# Altium PCB PCB1.PcbDoc
Units mm, origin at the board's own origin, x right, y up, seen from the top; angles counter-clockwise.
Board outline 109.07 x 200 mm, 2 copper layers (Top Layer, Bottom Layer); 62 components, 106 nets, 397 pads, 1 vias.
Unrouted connection lines stored in the file: 204.
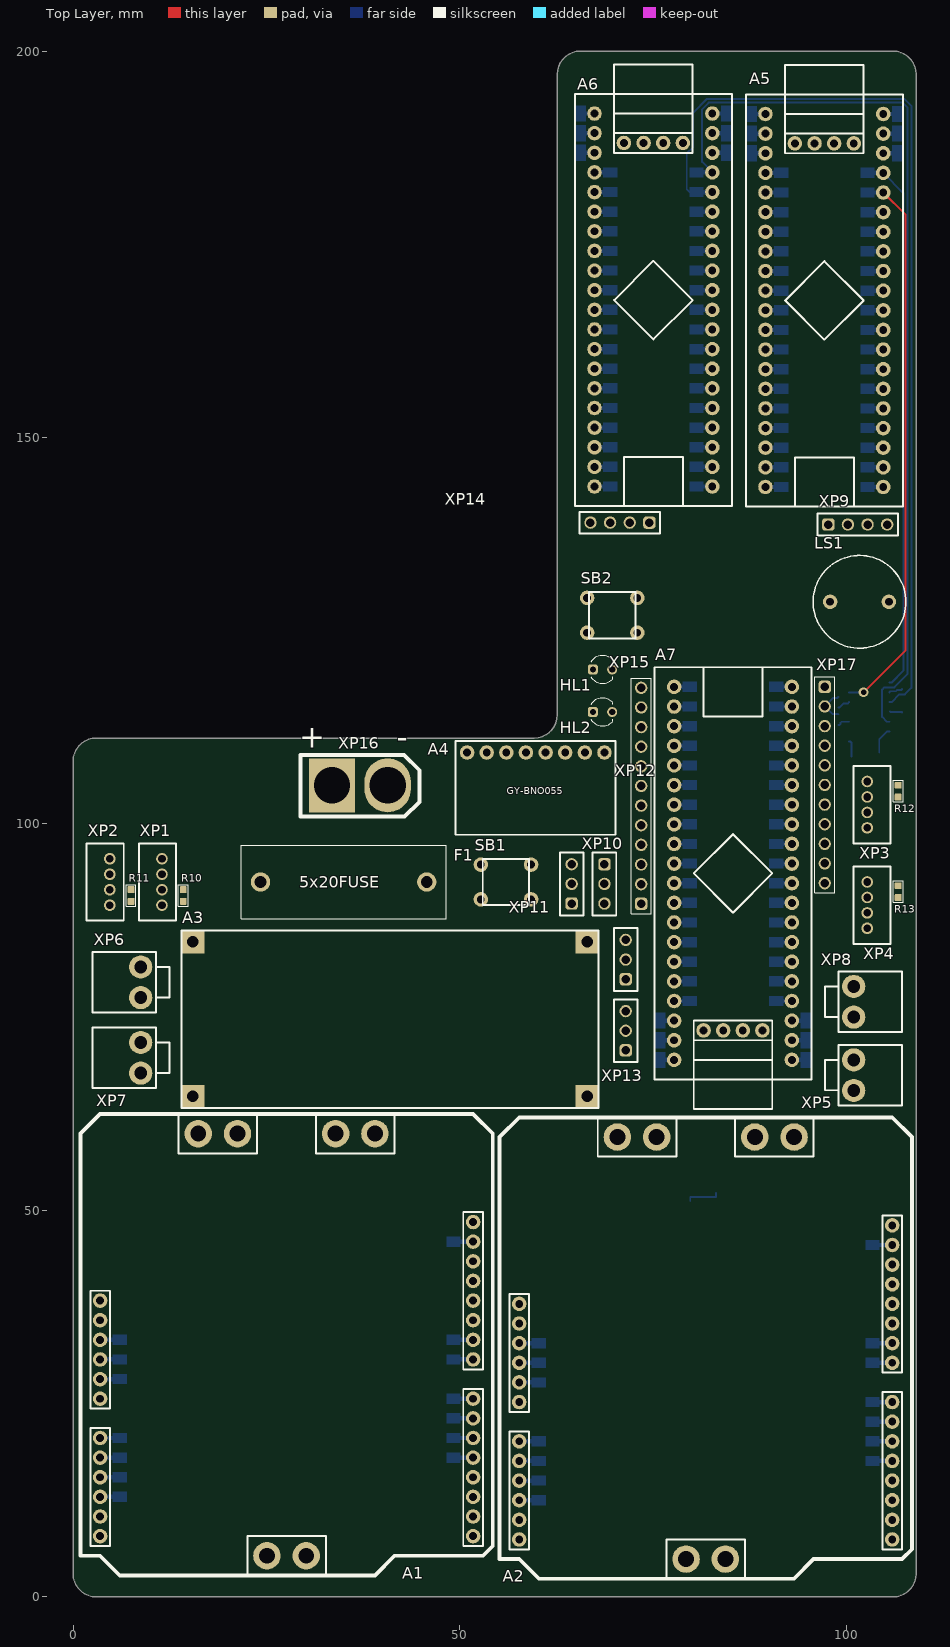
[diagram p0: Top Layer view]
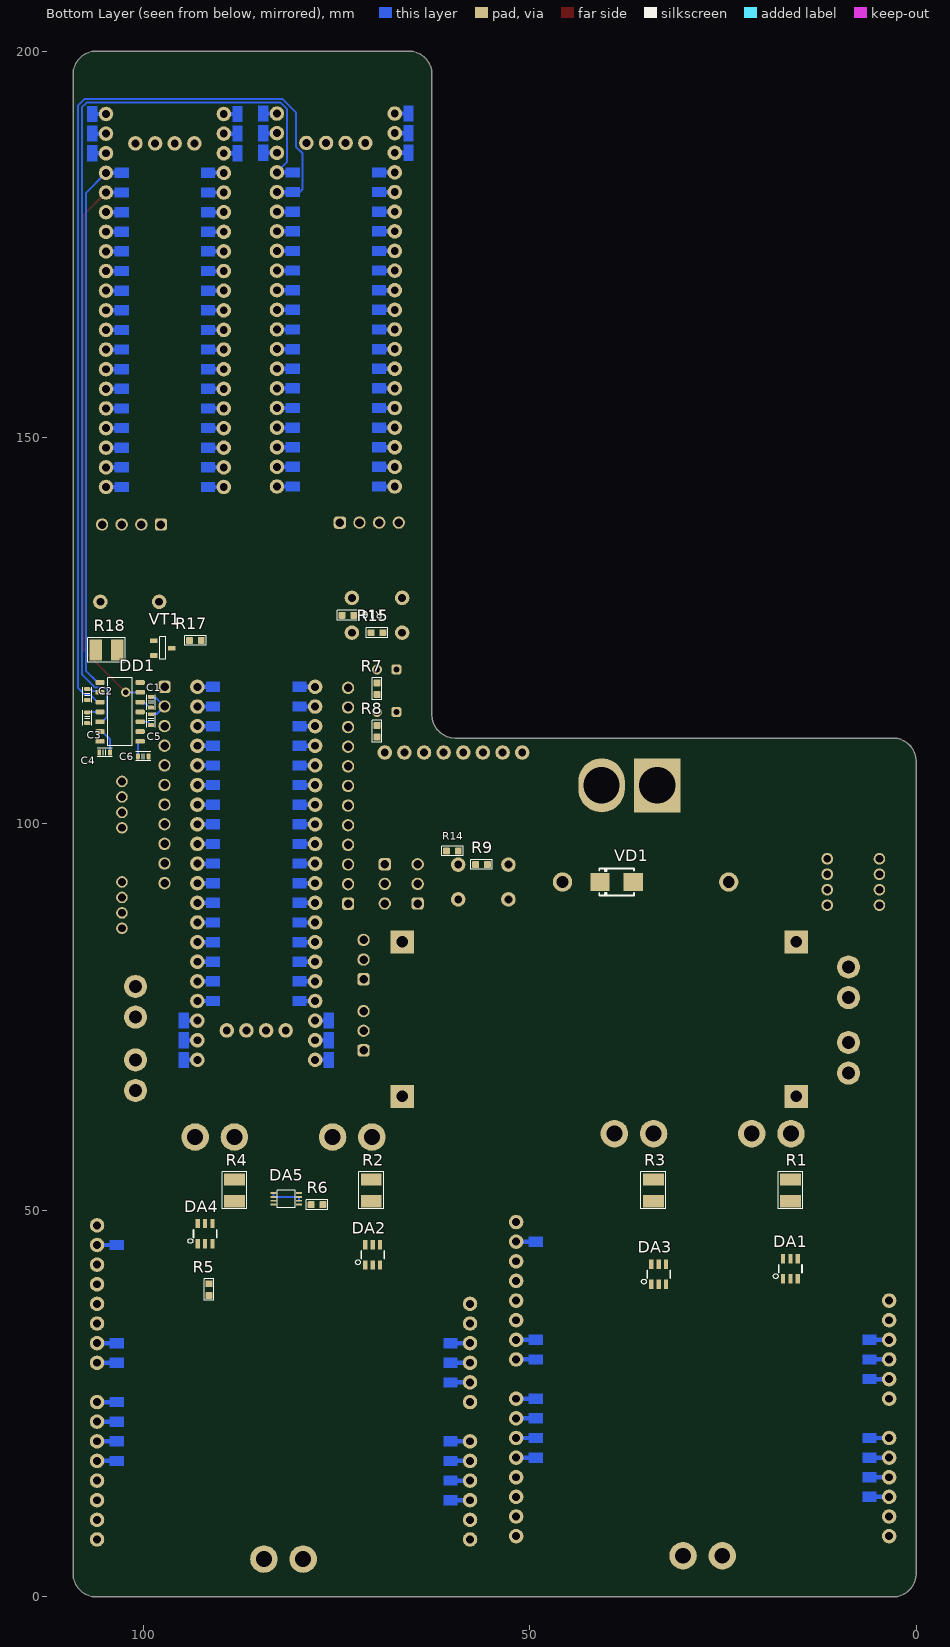
[diagram p1: Bottom Layer view, seen from below]

## Layer stack, top to bottom
Top Solder: solder mask 0.0102, Solder Resist, Dk 3.5
Top Layer: signal copper 0.0356
Dielectric 1: dielectric 0.32, FR-4, Dk 4.8
Bottom Layer: signal copper 0.0356
Bottom Solder: solder mask 0.0102, Solder Resist, Dk 3.5

## Board outline
0,3 0.046,2.479 0.181,1.974 0.402,1.5 0.702,1.072 1.072,0.702 1.5,0.402 1.974,0.181 2.479,0.046 3,0 106.074,0 106.595,0.046 107.1,0.181 107.574,0.402 108.003,0.702 108.372,1.072 108.672,1.5 108.893,1.974 109.029,2.479 109.074,3 109.074,197 109.029,197.521 108.893,198.026 108.672,198.5 108.372,198.928 108.003,199.298 107.574,199.598 107.1,199.819 106.595,199.954 106.074,200 65.648,200 65.127,199.954 64.622,199.819 64.148,199.598 63.72,199.298 63.35,198.928 63.05,198.5 62.829,198.026 62.694,197.521 62.648,197 62.648,114.12 62.603,113.599 62.467,113.094 62.246,112.62 61.946,112.192 61.576,111.822 61.148,111.522 60.674,111.301 60.169,111.166 59.648,111.12 3,111.12 2.479,111.074 1.974,110.939 1.5,110.718 1.072,110.418 0.702,110.048 0.402,109.62 0.181,109.146 0.046,108.641 0,108.12

## Design rules (kind name [scope] priority, off if disabled: settings)
BoardOutlineClearance [All] p1: gap=0.5 ignorepadtopadclearanceinfootprint=FALSE
Clearance Clearance_1 [All] p1: gap=0.254 ignorepadtopadclearanceinfootprint=FALSE except(0: Arc-Hole Track-Hole SMDPad-Hole THPad-Hole Via-Hole Fill-Hole Poly-Hole Region-Hole Text-Hole; 0.2: Arc-SMDPad Track-SMDPad SMDPad-SMDPad)
Clearance [All] p2: gap=0.3 ignorepadtopadclearanceinfootprint=FALSE
HoleSize [All] p1: absolutevalues=TRUE maxlimit=4.7 minlimit=0.025 maxpercent=80.000 minpercent=20.000
PolygonConnect [All] p1: connectstyle=Relief reliefconductorwidth=0.254 reliefentries=4 polygonreliefangle="90 Angle" airgapwidth=0.254
RoutingVias [All] p1: holewidth=0.711 width=1.27 viastyle="Through Hole" minholewidth=0.3 minwidth=0.5 maxholewidth=0.711 maxwidth=1.27
RoutingVias RoutingVias_1 [All] p2: holewidth=0.711 width=1.27 viastyle="Through Hole" minholewidth=0.711 minwidth=1.27 maxholewidth=0.711 maxwidth=1.27
SilkToSilkClearance [All] p1: silktosilkclearance=0.1
SilkToSolderMaskClearance [IsPad] p1: minsilkscreentomaskgap=0.1 clearancetoexposedcopper=TRUE
SolderMaskExpansion [All] p1: expansion=0.102 istentingtop=FALSE
Width [All] p1: maxlimit=3 minlimit=0.254 preferedwidth=0.254
27 further rules are at their usual default settings.

## Classes and differential pairs
component class Sheet2: A4 A7 C1 C2 C3 C4 C5 F1 HL1 HL2 LS1 R7 R8 R9 R10 R11 R12 R13 R14 R15 R16 R17 R18 SB1 SB2 VD1 VT1 XP15 XP16 XP17
component class Sheet1: A1 A2 A3 A5 A6 DA1 DA2 DA3 DA4 DA5 R1 R2 R3 R4 R5 R6 XP1 XP2 XP3 XP4 XP5 XP6 XP7 XP8 XP9 XP10 XP11 XP12 XP13 XP14

## Components (designator, comment, footprint, x,y, rotation, side; value= is the part's Value field where it differs from the comment)
A1 "Monster Moto Shield" "Monster Moto Shield" 27.62,32.625 r0 top
A2 "Monster Moto Shield" "Monster Moto Shield" 81.85,32.195 r0 top
A3 "DC-DC Board" "DC-DC Board" 14,63.25 r0 top
A4 "GY-BNO055" "GY-BNO055 board" 50.97,109.25 r270 top
A5 "Bluepill-stm32f103c8t6" BluePill 97.199,167.735 r180 top
A6 "Bluepill-stm32f103c8t6" BluePill 75.079,167.795 r180 top
A7 "Blackpill-stm32f401ccu6" BluePill 85.38,93.61 r0 top
C1 "10пФ" C0603C 99,115.75 r90 bottom value=10
C2 "10пФ" C0603C 107.25,116.75 r270 bottom value=10
C3 "10пФ" C0603C 107.25,113.75 r270 bottom value=10
C4 "10пФ" C0603C 105,109.25 r0 bottom value=10
C5 "=Value" C0603C 99,113.5 r90 bottom
C6 "=Value" C0603C 100,108.75 r180 bottom
DA1 "INA181A1IDBVR" SOT236 16.266,42.45 r180 bottom
DA2 "INA181A1IDBVR" SOT236 70.316,44.25 r180 bottom
DA3 "INA181A1IDBVR" SOT236 33.316,41.75 r180 bottom
DA4 "INA181A1IDBVR" SOT236 92,47 r180 bottom
DA5 "LM358DGKR" VSSOP-8 81.5,51.5 r180 bottom
DD1 "74HC14" SO-14 103,114.5 r0 bottom
F1 "ва" BLX-A 35,92.5 r180 top
HL1 "Обозначение при заказе" ledrad3mm 68.5,120 r0 top
HL2 "Обозначение при заказе" ledrad3mm 68.5,114.5 r0 top
LS1 "Обозначение при заказе" "Buzzer 12mm" 101.75,128.75 r0 top
R1 "ва" R1210 16.25,52.6 r90 bottom
R2 "ва" R1210 70.5,52.6 r90 bottom
R3 "ва" R1210 34,52.6 r90 bottom
R4 "ва" R1210 88.2,52.6 r270 bottom
R5 "ва" R0603 91.5,39.75 r180 bottom
R6 "ва" R0603 77.512,50.75 r270 bottom
R7 "ва" R0603 69.75,117.5 r180 bottom
R8 "ва" R0603 69.75,112 r180 bottom
R9 "ва" R0603 56.238,94.75 r270 bottom
R10 "ва" R0603 14.25,90.75 r0 top
R11 "ва" R0603 7.5,90.75 r0 top
R12 "ва" R0603 106.75,104.25 r180 top
R13 "ва" R0603 106.75,91.25 r180 top
R14 "ва" R0603 60,96.5 r270 bottom
R15 "ва" R0603 69.75,124.75 r270 bottom
R16 "ва" R0603 73.512,127 r270 bottom
R17 "ва" R0603 93.25,123.75 r90 bottom
R18 "ва" R1210 104.75,122.5 r180 bottom
SB1 "KLS7-TS6601-13.0-180" Button 56,92.5 r0 top
SB2 "KLS7-TS6601-13.0-180" Button 69.75,127 r0 top
VD1 "Диод защитный" SMB 38.75,92.5 r0 bottom
VT1 "" SOT23-3-BEC 97.475,122.75 r180 bottom
XP1 "JST4" "JST 4pin" 11.5,89.5 r90 top
XP2 "JST4" "JST 4pin" 4.75,89.5 r90 top
XP3 "JST4" "JST 4pin" 102.75,105.5 r270 top
XP4 "JST4" "JST 4pin" 102.75,92.5 r270 top
XP5 "B2P-VH" B2P-VH 101,67.5 r90 top
XP6 "B2P-VH" B2P-VH 8.75,79.52 r270 top
XP7 "B2P-VH" B2P-VH 8.75,69.75 r270 top
XP8 "B2P-VH" B2P-VH 101,77 r90 top
XP9 "" PLS-4 101.52,138.75 r0 top
XP10 "" PLS-3 68.75,92.25 r270 top
XP11 "" PLS-3 64.5,92.25 r90 top
XP12 "" PLS-3 71.5,82.46 r90 top
XP13 "" PLS-3 71.5,73.25 r90 top
XP14 "" PLS-4 70.75,139 r180 top
XP15 "" PLS-12 73.5,103.65 r90 top
XP16 "XT60" XT60UPB-M 33.5,105 r0 top
XP17 "" PLS-11 97.25,105.05 r270 top

## Footprints (in the part's own frame and the unit in brackets; to place one, negate y for a bottom-side part, rotate by r counter-clockwise, add the part's x,y. Pads: shape width x height; smd on the part's side, far side on the other; paste and mask are expansions set on the pad)
B2P-VH [mm]
  round 3 hole 1.65: 1(-1.98,0) 2(1.98,0)
  silkscreen extent -3.93,-6.22 3.93,3.7
BluePill [mil]
  round 74 hole 40: 1(-300,950) 2(-300,850) 3(-300,750) 4(-300,650) 5(-300,550) 6(-300,450) 7(-300,350) 8(-300,250) 9(-300,150) 10(-300,50) 11(-300,-50) 12(-300,-150) 13(-300,-250) 14(-300,-350) 15(-300,-450) 16(-300,-550) 17(-300,-650) 18(-300,-750) 19(-300,-850) 20(-300,-950) 21(300,950) 22(300,850) 23(300,750) 24(300,650) 25(300,550) 26(300,450) 27(300,350) 28(300,250) 29(300,150) 30(300,50) 31(300,-50) 32(300,-150) 33(300,-250) 34(300,-350) 35(300,-450) 36(300,-550) 37(300,-650) 38(300,-750) 39(300,-850) 40(300,-950) 41(-150,-800) 42(-50,-800) 43(50,-800) 44(150,-800)
  Bottom Layer region: 345,-990 395,-990 395,-910 345,-910
  Bottom Layer region: 330,-960 350,-960 350,-940 330,-940
  Bottom Layer region: 345,-890 395,-890 395,-810 345,-810
  Bottom Layer region: 330,-860 350,-860 350,-840 330,-840
  Bottom Layer region: 345,-790 395,-790 395,-710 345,-710
  Bottom Layer region: 330,-760 350,-760 350,-740 330,-740
  Bottom Layer region: -345,-910 -395,-910 -395,-990 -345,-990
  Bottom Layer region: -330,-940 -350,-940 -350,-960 -330,-960
  Bottom Layer region: -345,-810 -395,-810 -395,-890 -345,-890
  Bottom Layer region: -330,-840 -350,-840 -350,-860 -330,-860
  Bottom Layer region: -345,-710 -395,-710 -395,-790 -345,-790
  Bottom Layer region: -330,-740 -350,-740 -350,-760 -330,-760
  Bottom Layer region: 255,975 185,975 185,925 255,925
  Bottom Layer region: 270,960 250,960 250,940 270,940
  Bottom Layer region: 255,875 185,875 185,825 255,825
  Bottom Layer region: 270,860 250,860 250,840 270,840
  Bottom Layer region: 255,775 185,775 185,725 255,725
  Bottom Layer region: 270,760 250,760 250,740 270,740
  Bottom Layer region: 255,675 185,675 185,625 255,625
  Bottom Layer region: 270,660 250,660 250,640 270,640
  Bottom Layer region: 255,575 185,575 185,525 255,525
  Bottom Layer region: 270,560 250,560 250,540 270,540
  Bottom Layer region: 255,475 185,475 185,425 255,425
  Bottom Layer region: 270,460 250,460 250,440 270,440
  Bottom Layer region: 255,375 185,375 185,325 255,325
  Bottom Layer region: 270,360 250,360 250,340 270,340
  Bottom Layer region: 255,275 185,275 185,225 255,225
  Bottom Layer region: 270,260 250,260 250,240 270,240
  Bottom Layer region: 255,175 185,175 185,125 255,125
  Bottom Layer region: 270,160 250,160 250,140 270,140
  Bottom Layer region: 255,75 185,75 185,25 255,25
  Bottom Layer region: 270,60 250,60 250,40 270,40
  Bottom Layer region: 255,-25 185,-25 185,-75 255,-75
  Bottom Layer region: 270,-40 250,-40 250,-60 270,-60
  Bottom Layer region: 255,-125 185,-125 185,-175 255,-175
  Bottom Layer region: 270,-140 250,-140 250,-160 270,-160
  Bottom Layer region: 255,-225 185,-225 185,-275 255,-275
  Bottom Layer region: 270,-240 250,-240 250,-260 270,-260
  Bottom Layer region: 255,-325 185,-325 185,-375 255,-375
  Bottom Layer region: 270,-340 250,-340 250,-360 270,-360
  Bottom Layer region: 255,-425 185,-425 185,-475 255,-475
  Bottom Layer region: 270,-440 250,-440 250,-460 270,-460
  Bottom Layer region: 255,-525 185,-525 185,-575 255,-575
  Bottom Layer region: 270,-540 250,-540 250,-560 270,-560
  Bottom Layer region: 255,-625 185,-625 185,-675 255,-675
  Bottom Layer region: 270,-640 250,-640 250,-660 270,-660
  Bottom Layer region: -255,-675 -185,-675 -185,-625 -255,-625
  Bottom Layer region: -270,-660 -250,-660 -250,-640 -270,-640
  Bottom Layer region: -255,-575 -185,-575 -185,-525 -255,-525
  Bottom Layer region: -270,-560 -250,-560 -250,-540 -270,-540
  Bottom Layer region: -255,-475 -185,-475 -185,-425 -255,-425
  Bottom Layer region: -270,-460 -250,-460 -250,-440 -270,-440
  Bottom Layer region: -255,-375 -185,-375 -185,-325 -255,-325
  Bottom Layer region: -270,-360 -250,-360 -250,-340 -270,-340
  Bottom Layer region: -255,-275 -185,-275 -185,-225 -255,-225
  Bottom Layer region: -270,-260 -250,-260 -250,-240 -270,-240
  Bottom Layer region: -255,-175 -185,-175 -185,-125 -255,-125
  Bottom Layer region: -270,-160 -250,-160 -250,-140 -270,-140
  Bottom Layer region: -255,-75 -185,-75 -185,-25 -255,-25
  Bottom Layer region: -270,-60 -250,-60 -250,-40 -270,-40
  Bottom Layer region: -255,25 -185,25 -185,75 -255,75
  Bottom Layer region: -270,40 -250,40 -250,60 -270,60
  Bottom Layer region: -255,125 -185,125 -185,175 -255,175
  Bottom Layer region: -270,140 -250,140 -250,160 -270,160
  Bottom Layer region: -255,225 -185,225 -185,275 -255,275
  Bottom Layer region: -270,240 -250,240 -250,260 -270,260
  Bottom Layer region: -255,325 -185,325 -185,375 -255,375
  Bottom Layer region: -270,340 -250,340 -250,360 -270,360
  Bottom Layer region: -255,425 -185,425 -185,475 -255,475
  Bottom Layer region: -270,440 -250,440 -250,460 -270,460
  Bottom Layer region: -255,525 -185,525 -185,575 -255,575
  Bottom Layer region: -270,540 -250,540 -250,560 -270,560
  Bottom Layer region: -255,625 -185,625 -185,675 -255,675
  Bottom Layer region: -270,640 -250,640 -250,660 -270,660
  Bottom Layer region: -255,725 -185,725 -185,775 -255,775
  Bottom Layer region: -270,740 -250,740 -250,760 -270,760
  Bottom Layer region: -255,825 -185,825 -185,875 -255,875
  Bottom Layer region: -270,840 -250,840 -250,860 -270,860
  Bottom Layer region: -255,925 -185,925 -185,975 -255,975
  Bottom Layer region: -270,940 -250,940 -250,960 -270,960
  silkscreen extent -400,-1200 400,1050
BLX-A [mm] "Держатель для предохрнителей 5x20 mm"
  round 2.5 hole 1.5: 1(-10.75,0) 2(10.75,0)
  silkscreen extent -13.25,-4.75 13.25,4.75
Button [mil]
  round 74 hole 40: 1(-127.95,-88.58) 1(-127.95,88.58) 2(127.95,-88.58) 2(127.95,88.58)
  silkscreen extent -118,-118 118,118
"Buzzer 12mm" [mil]
  round 74 hole 40: 1(-149.61,0) 2(149.61,0)
  silkscreen extent -236,-236 236,236
C0603C [mm]
  rrect50% 0.5x0.8 smd: 1(-0.7,0) 2(0.7,0)
  silkscreen extent -0.97,-0.58 0.97,0.58, body extent -0.8,-0.4 0.8,0.4, height 0.5
"DC-DC Board" [mm]
  rect 3x3 hole 1.5: 1(1.5,1.5) 2(1.5,21.5) 3(52.5,21.5) 4(52.5,1.5)
  silkscreen extent 0,0 54,23
"GY-BNO055 board" [mil]
  round 74 hole 40: 1(0,0) 2(0,100) 3(0,200) 4(0,300) 5(0,400) 6(0,500) 7(0,600) 8(0,700)
  silkscreen extent -59,-59 419,756
"JST 4pin" [mm]
  round 1.5 hole 1: 1(0,0) 2(2,0) 3(4,0) 4(6,0)
  silkscreen extent -2,-1.8 8,3
ledrad3mm [mm]
  rrect50% 1.3x1.3 hole 0.8: 1(-1.252,0)
  round 1.3 hole 0.8: 2(1.252,0)
  silkscreen extent -1.54,-1.8 1.3,1.8, body extent -2.01,-2 1.5,2, height 15.5
"Monster Moto Shield" [mil]
  round 74 hole 40: 1(-950,-475) 2(-950,-575) 3(-950,-675) 4(-950,-775) 5(950,-575) 6(950,-475) 7(950,-375) 8(950,-275) 9(950,-75) 10(950,25) 16(-950,-175) 17(-950,-75) 18(950,525) 19(-950,25) ""(-950,-975) ""(-950,-875) ""(-950,-275) ""(-950,125) ""(-950,225) ""(950,-975) ""(950,-875) ""(950,-775) ""(950,-675) ""(950,125) ""(950,225) ""(950,325) ""(950,425) ""(950,625)
  round 140 hole 81: 11(-450,1075) 12(-250,1075) 13(250,1075) 14(450,1075) 20(-100,-1075) 21(100,-1075)
  Bottom Layer region: 925,535 880,535 880,515 925,515
  Bottom Layer region: 885,550 815,550 815,500 885,500
  Bottom Layer region: 925,35 880,35 880,15 925,15
  Bottom Layer region: 885,50 815,50 815,0 885,0
  Bottom Layer region: 925,-65 880,-65 880,-85 925,-85
  Bottom Layer region: 885,-50 815,-50 815,-100 885,-100
  Bottom Layer region: 925,-265 880,-265 880,-285 925,-285
  Bottom Layer region: 885,-250 815,-250 815,-300 885,-300
  Bottom Layer region: 925,-365 880,-365 880,-385 925,-385
  Bottom Layer region: 885,-350 815,-350 815,-400 885,-400
  Bottom Layer region: 925,-465 880,-465 880,-485 925,-485
  Bottom Layer region: 885,-450 815,-450 815,-500 885,-500
  Bottom Layer region: 925,-565 880,-565 880,-585 925,-585
  Bottom Layer region: 885,-550 815,-550 815,-600 885,-600
  Bottom Layer region: -925,-785 -880,-785 -880,-765 -925,-765
  Bottom Layer region: -885,-800 -815,-800 -815,-750 -885,-750
  Bottom Layer region: -925,-685 -880,-685 -880,-665 -925,-665
  Bottom Layer region: -885,-700 -815,-700 -815,-650 -885,-650
  Bottom Layer region: -925,-585 -880,-585 -880,-565 -925,-565
  Bottom Layer region: -885,-600 -815,-600 -815,-550 -885,-550
  Bottom Layer region: -925,-485 -880,-485 -880,-465 -925,-465
  Bottom Layer region: -885,-500 -815,-500 -815,-450 -885,-450
  Bottom Layer region: -925,-185 -880,-185 -880,-165 -925,-165
  Bottom Layer region: -885,-200 -815,-200 -815,-150 -885,-150
  Bottom Layer region: -925,-85 -880,-85 -880,-65 -925,-65
  Bottom Layer region: -885,-100 -815,-100 -815,-50 -885,-50
  Bottom Layer region: -925,15 -880,15 -880,35 -925,35
  Bottom Layer region: -885,0 -815,0 -815,50 -885,50
  silkscreen extent -1050,-1175 1050,1175
PLS-3 [mm]
  rrect50% 1.6x1.6 hole 1.1: 1(-2.54,0)
  round 1.6 hole 1.1: 2(0,0) 3(2.54,0)
  silkscreen extent -4.06,-1.52 4.06,1.52, body extent -3.81,-1.27 3.81,1.27, height 8.5
PLS-4 [mm]
  rrect50% 1.6x1.6 hole 1.1: 1(-3.81,0)
  round 1.6 hole 1.1: 2(-1.27,0) 3(1.27,0) 4(3.81,0)
  silkscreen extent -5.21,-1.4 5.21,1.4, body extent -5.08,-1.27 5.08,1.27, height 8.5
PLS-11 [mm]
  rrect50% 1.6x1.6 hole 1.1: 1(-12.7,0)
  round 1.6 hole 1.1: 2(-10.16,0) 3(-7.62,0) 4(-5.08,0) 5(-2.54,0) 6(0,0) 7(2.54,0) 8(5.08,0) 9(7.62,0) 10(10.16,0) 11(12.7,0)
  silkscreen extent -13.97,-1.27 13.97,1.27, body extent -13.97,-1.27 13.97,1.27, height 8.5
PLS-12 [mm]
  rrect50% 1.6x1.6 hole 1.1: 1(-13.97,0)
  round 1.6 hole 1.1: 2(-11.43,0) 3(-8.89,0) 4(-6.35,0) 5(-3.81,0) 6(-1.27,0) 7(1.27,0) 8(3.81,0) 9(6.35,0) 10(8.89,0) 11(11.43,0) 12(13.97,0)
  silkscreen extent -15.24,-1.27 15.24,1.27, body extent -15.24,-1.27 15.24,1.27, height 8.5
R0603 [mil]
  rrect25% 35x35 smd: 1(0,30) 2(0,-30)
  silkscreen extent -25,-55 25,55, body extent -15,-32 16,31, height 18
R1210 [mm]
  rect 1.6x2.7 smd: 1(-1.4,0) 2(1.4,0)
  silkscreen extent -2.4,-1.6 2.4,1.6, body extent -1.5,-1.3 1.6,1.3, height 0.55
SMB [mm]
  rect 2.5x2.3 smd: 1(-2.15,0) 2(2.15,0)
  silkscreen extent -2.25,-1.75 2.25,1.75
SO-14 [mm] "SOIC, 14-Leads, Body 8,65x3,90mm, Pitch 1,27mm, IPC Medium Density"
  rrect50% 1.2x0.6 smd: 1(-2.6,3.81) 2(-2.6,2.54) 3(-2.6,1.27) 4(-2.6,0) 5(-2.6,-1.27) 6(-2.6,-2.54) 7(-2.6,-3.81) 8(2.6,-3.81) 9(2.6,-2.54) 10(2.6,-1.27) 11(2.6,0) 12(2.6,1.27) 13(2.6,2.54) 14(2.6,3.81)
  silkscreen extent -1.6,-4.4 1.6,4.4, body extent -3,-4.4 3,4.4, height 1.75
SOT23-3-BEC [mm] "SOT23, 3 pin"
  rrect25% 1x0.6 smd: B(-1.15,0.95) C(1.15,0) E(-1.15,-0.95)
  silkscreen extent -0.38,-1.45 0.38,1.45, body extent -1.4,-1.45 1.4,1.45, height 1.29
SOT236 [mm]
  rect 0.55x1.2 smd: 1(-0.95,-1.3) 2(0,-1.3) 3(0.95,-1.3) 4(0.95,1.3) 5(0,1.3) 6(-0.95,1.3)
  silkscreen extent -2.22,-1.27 1.5,0.5, body extent -1.47,-1.42 1.45,1.42, height 1.15
VSSOP-8 [mm]
  rect 0.75x0.25 smd: 1(-1.65,0.75) 2(-1.65,0.25) 3(-1.65,-0.25) 4(-1.65,-0.75) 5(1.65,-0.75) 6(1.65,-0.25) 7(1.65,0.25) 8(1.65,0.75)
  round 0.3 on Bottom Overlay: ""(-1.275,1.4)
  silkscreen extent -1.15,-1.12 1.15,1.1, body extent -1.63,-1.05 1.57,1.05, height 0.9
XT60UPB-M [mm]
  rect 6x7 hole 4.7: 1(0,0)
  oval 6x7 hole 4.7: 2(7.2,0)
  silkscreen extent -4.1,-4.05 11.3,3.95

## Part data
A1 A2: library part MonsterMotoShield, "Драйвер двигателей Monster Moto Shield построен на базе чипа VNH2SP30, что позволяет управлять, как скоростью движения, так и направлением подключённых двигателей, а так же блокировать моторы и считывать ток потребления, используя аналоговые выводы Arduino."
A3: library part DC-DC, "Преобразователь напряжений 12-5В"
A4: "Девятиосный датчик инерциальной навигации"
A5 A6: library part BluePill, "Отладочная плата на основе микроконтроллера stm32f103c8t6"
A7: library part BlackPill, "Отладочная плата на основе микроконтроллера stm32f401ccu6"
C1 C2 C3 C4 C5 C6: library part Capasitor, "Конденсатор 0603"
  C1 C2 C3 C4: Units=пФ
DA1 DA2 DA3 DA4: "Усилители операционные, дифференциальные, инструментальные, Gain 20, SOT236"
DA5: "Операционный усилитель, Двойной, 700 кГц, 0.3 В/мкс, 3В до 32В, ± 1.5В до ± 16В, [VSSOP-8]"
DD1: "Инвертирующий гестерезисный триггер Шмитта (SO14)"
F1: library part Fuse, "Предохранитель плавкий"
HL1 HL2: library part LED, "LED 3мм"
LS1: library part Buzzer, "Зуммер 5В (D=12мм)"
R1 R2 R3 R4 R18: library part Resisitor, "Резистор постоянный"
R5 R6 R7 R8 R9 R10 R11 R12 R13 R14 R15 R16 R17: library part R1_POSTOYANNYJ_W0.5, "Резистор постоянный"
SB1 SB2: library part Button, "Тактовая кнопка 6x6 мм", Part number=KLS7-TS6601-13.0-180
VD1: library part "Diode TVS"
VT1: library part BCR112E6327HTSA1, "NPN Биполярный транзистор (SOT23)"
XP5 XP6 XP7 XP8: library part "JST VH(B2P-VH)", "JST VH(B2P-VH)"
XP9 XP14: library part Connector-4, "PLS4"
XP10 XP11 XP12 XP13: library part Connector-3, "PLS3"
XP15: library part Connector-12, "PLS12"
XP17: library part Connector-11, "PLS11"

## Via types
v1: diameter 1.27, hole 0.711, Top Layer to Bottom Layer, 1 vias

## Nets (pads, with @x,y where several pads share a name; then routed paths per layer and width w, separated by ;. In a path a pad name is that pad's centre, name@x,y a point inside that pad or via, vN(x,y) a via of type N, cw(c..) or ccw(c..) an arc to the next point about the centre after c; other vN are vias at no path point)
1V65: DA1.1 DA2.1 DA3.1 DA4.1 DA5.1 DA5.2 DA5.6 DA5.7 | length 4.3
  Bottom Layer w0.254: DA5.6 DA5.7 DA5.2 DA5.1
3V3: A4.8 A7.20 A7.23 DA1.3 DA2.3 DA3.3 DA4.3 DA5.8 DD1.14 R5.2 R9.1 R15.1 XP1.1 XP2.1 XP3.1 XP4.1 XP15.1 XP17.3
5V: A1.19 A2.19 A3.3 A5.18 A6.18 A7.18 A7.21 LS1.1 XP15.3 XP17.1
12V: A1.20 A2.20 A3.1 F1.1 VD1.2
CS1_1: A2.3 XP12.3
CS1_1F: A5.34 XP12.2
CS1_2: A1.3 XP10.3
CS1_2F: A6.34 XP10.2
CS2_1: A2.4 XP13.3
CS2_1F: A5.33 XP13.2
CS2_2: A1.4 XP11.3
CS2_2F: A6.33 XP11.2
EN1_1: A2.1 A5.10
EN1_2: A1.1 A6.10
EN2_1: A2.2 A5.13
EN2_2: A1.2 A6.13
ENC1_CH1_1: A5.5 R10.1 XP1.2
ENC1_CH1_2: A6.5 R12.1 XP3.2
ENC1_CH1F_1: A5.16 DD1.6 | length 70
  Top Layer w0.254: v1(102.275,117.05) 107.725,122.5 107.725,178.799 A5.16
  Bottom Layer w0.254: DD1.6 102.265,117.04 v1(102.275,117.05)
ENC1_CH1F_2: A6.16 DD1.10 | length 122
  Bottom Layer w0.254: A6.16 79.778,181.765 79.397,182.146 79.397,186.755 80.21,187.568 80.21,192.022 82.018,193.83 107.54,193.83 108.447,192.923 108.447,117.608 107.608,116.768 106.898,116.768 105.9,115.77 DD1.10
ENC1_CH2_1: A5.6 XP1.3
ENC1_CH2_2: A6.6 XP3.3
ENC2_CH1_1: A5.35 R11.1 XP2.2
ENC2_CH1_2: A6.35 R13.1 XP4.2
ENC2_CH1F_1: A5.17 DD1.8 | length 68
  Bottom Layer w0.254: A5.17 107.431,181.633 107.431,119.841 105.9,118.31 DD1.8
ENC2_CH1F_2: A6.17 DD1.12 | length 118
  Bottom Layer w0.254: A6.17 82.699,184.336 81.378,185.657 81.378,192.472 82.228,193.322 107.33,193.322 107.939,192.713 107.939,119.375 106.248,117.683 104.968,117.683 104.673,117.388 104.673,113.857 105.3,113.23 DD1.12
ENC2_CH2_1: A5.36 XP2.3
ENC2_CH2_2: A6.36 XP4.3
GND: A1.16 A1.17 A1.18 A2.16 A2.17 A2.18 A3.4 A4.7 A5.19 A5.21 A5.22 A5.44 A6.19 A6.21 A6.22 A6.44 A7.19 A7.22 C1.2 C2.2 C3.2 C4.2 C5.2 C6.2 DA1.2 DA2.2 DA3.2 DA4.2 DA5.4 DD1.7 R6.1 R7.2 R8.2 SB1.1 SB2.1 VT1.E XP1.4 XP2.4 XP3.4 XP4.4 XP9.4 XP14.4 XP15.2 XP17.2 | length 4.4
  Bottom Layer w0.254: C5.2 98.959,114.241 98.219,114.241 XP17.2 98.367,116.327 98.877,116.327 C1.2
I2C_SCL: A4.6 A7.14 XP15.5
I2C_SDA: A4.5 A7.15 XP15.4
IMU_INT: A4.3 A7.17
INA1_1: A2.8 A5.14
INA1_2: A1.8 A6.14
INA2_1: A2.5 A5.11
INA2_2: A1.5 A6.11
INB1_1: A2.9 A5.15
INB1_2: A1.9 A6.15
INB2_1: A2.10 A5.12
INB2_2: A1.10 A6.12
INU_ADDR: A4.4 A7.16
NetA1_11: A1.11 DA1.4 R1.2
NetA1_12: A1.12 XP6.2
NetA1_13: A1.13 DA3.4 R3.2
NetA1_14: A1.14 XP7.2
NetA2_11: A2.11 DA2.4 R2.2
NetA2_12: A2.12 XP5.2
NetA2_13: A2.13 DA4.4 R4.2
NetA2_14: A2.14 XP8.2
NetA5_41: A5.41 A5.42 A5.43 XP9.1 XP9.2 XP9.3
NetA6_41: A6.41 XP14.1
NetA6_42: A6.42 XP14.2
NetA6_43: A6.43 XP14.3
NetA7_10: A7.10 DD1.2
NetA7_11: A7.11 DD1.4
NetA7_12: A7.12 HL1.1
NetA7_13: A7.13 HL2.1
NetA7_35: A7.35 R17.1
NetC1_1: C1.1 DD1.5 R10.2 | length 1.7
  Bottom Layer w0.254: C1.1 99.15,115.05 99.711,115.611 100.241,115.611 DD1.5
NetC2_1: C2.1 DD1.9 R11.2 | length 1.8
  Bottom Layer w0.254: DD1.9 105.735,117.175 106.458,117.175 106.61,117.327 107.127,117.327 C2.1
NetC3_1: C3.1 DD1.11 R12.2 | length 1.6
  Bottom Layer w0.254: DD1.11@105.7,114.54 105.765,114.475 107.225,114.475 C3.1
NetC4_1: C4.1 DD1.13 R13.2 | length 3.4
  Bottom Layer w0.254: C4.1 104.3,110.96 105.3,111.96 DD1.13
NetC5_1: C5.1 DD1.3 R14.2 | length 1.7
  Bottom Layer w0.254: C5.1 99.15,112.8 99.273,112.923 99.273,113.073 99.43,113.23 DD1.3
NetC6_1: C6.1 DD1.1 R16.2 | length 2.1
  Bottom Layer w0.254: DD1.1 100.529,110.69 100.7,110.519 C6.1
NetDA1_5: DA1.5 R1.1 XP6.1
NetDA1_6: DA1.6 XP10.1
NetDA2_5: DA2.5 R2.1 XP5.1
NetDA2_6: DA2.6 XP12.1
NetDA3_5: DA3.5 R3.1 XP7.1
NetDA3_6: DA3.6 XP11.1
NetDA4_5: DA4.5 R4.1 XP8.1
NetDA4_6: DA4.6 XP13.1
NetDA5_3: DA5.3 DA5.5 R5.1 R6.2
NetF1_2: F1.2 XP16.1
NetHL1_2: HL1.2 R7.1
NetHL2_2: HL2.2 R8.1
NetLS1_2: LS1.2 R18.2
NetR9_2: R9.2 R14.1 SB1.2
NetR15_2: R15.2 R16.1 SB2.2
NetR17_2: R17.2 VT1.B
NetR18_1: R18.1 VT1.C
PA1: A7.34 XP17.8
PA2: A7.33 XP17.7
PA8: A7.5 XP15.8
PA9: A7.6 XP15.7
PA10: A7.7 XP15.6
PB0: A7.27 XP17.6
PB1: A7.26 XP17.5
PB10: A7.24 XP17.4
PB12: A7.1 XP15.12
PB13: A7.2 XP15.11
PB14: A7.3 XP15.10
PB15: A7.4 XP15.9
PC13: A7.39 XP17.11
PC14: A7.38 XP17.10
PC15: A7.37 XP17.9
PWM1_1: A2.6 A5.30
PWM1_2: A1.6 A6.30
PWM2_1: A2.7 A5.29
PWM2_2: A1.7 A6.29
"PWR GND": A1.21 A2.21 A3.2 VD1.1 XP16.2
SPI2_MISO: A5.3 A6.3 A7.29
SPI2_MOSI: A5.4 A6.4 A7.28
SPI2_NSS_1: A5.1 A7.32
SPI2_NSS_2: A6.1 A7.31
SPI2_SCK: A5.2 A6.2 A7.30
pads on no net: A1. A2. A4.1 A4.2 A5.7 A5.8 A5.9 A5.20 A5.23 A5.24 A5.25 A5.26 A5.27 A5.28 A5.31 A5.32 A5.37 A5.38 A5.39 A5.40 A6.7 A6.8 A6.9 A6.20 A6.23 A6.24 A6.25 A6.26 A6.27 A6.28 A6.31 A6.32 A6.37 A6.38 A6.39 A6.40 A7.8 A7.9 A7.25 A7.36 A7.40 A7.41 A7.42 A7.43 A7.44 DA5.

## Silkscreen, mask and mechanical layers (free items; w line width, h text height)
Mechanical 1:
  lines w0.25: 3,-0.125 106.074,-0.125

## Text inside footprints (layer, text, board x,y; h text height)
F1: Top Overlay "5x20FUSE" at 29.254,91.754 h1.52
XP16: Top Overlay "+" at 29.27,108.885 h5; Top Overlay "-" at 41.891,108.841 h5